# Altium PCB motor-controller.PcbDoc
Units mm, origin at the board's own origin, x right, y up, seen from the top; angles counter-clockwise.
Board outline 152.4 x 101.6 mm, 2 copper layers (Top Layer, Bottom Layer); 105 components, 70 nets, 326 pads, 119 vias.
Unrouted connection lines stored in the file: 218.
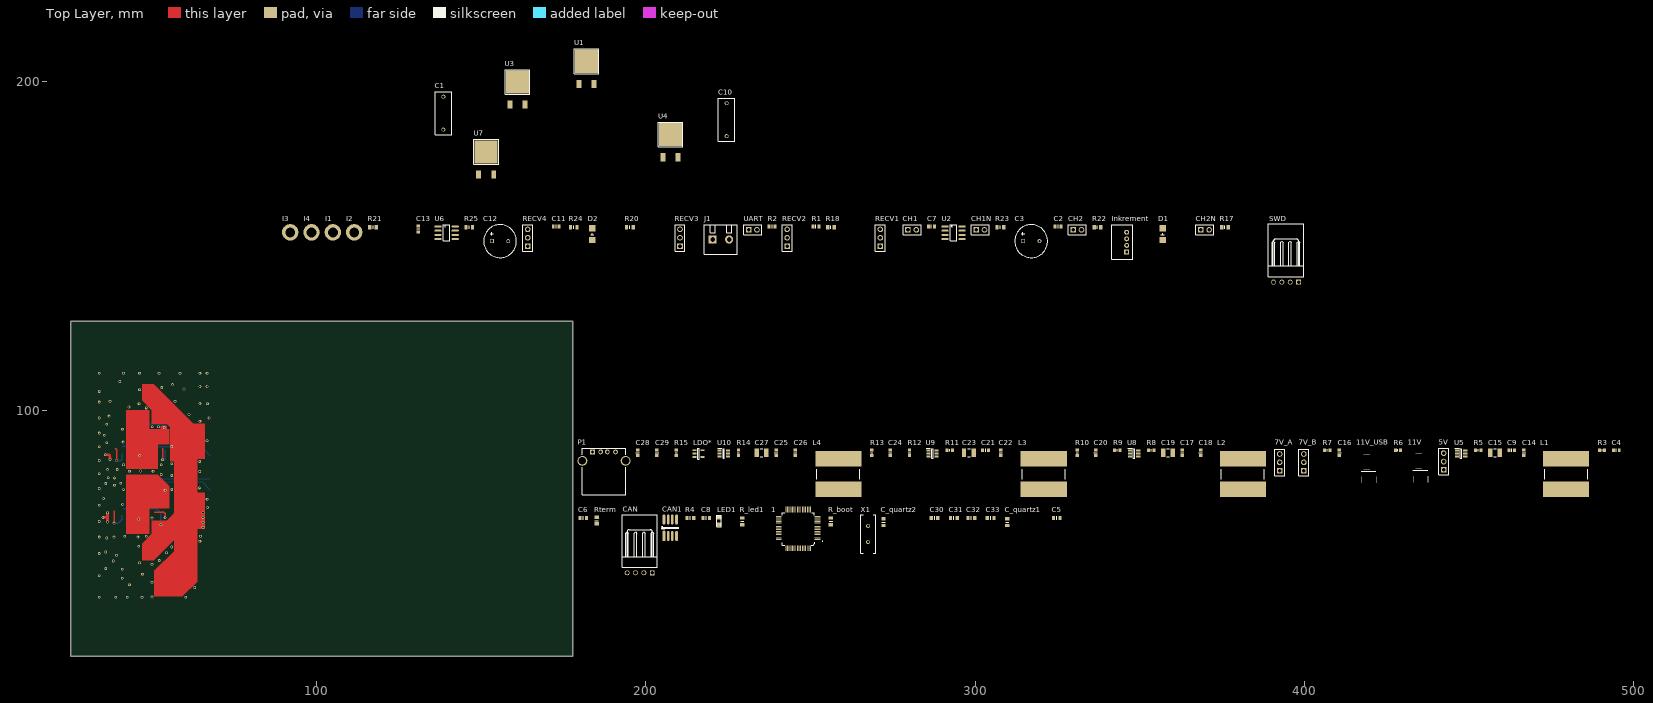
[diagram p0: Top Layer view]
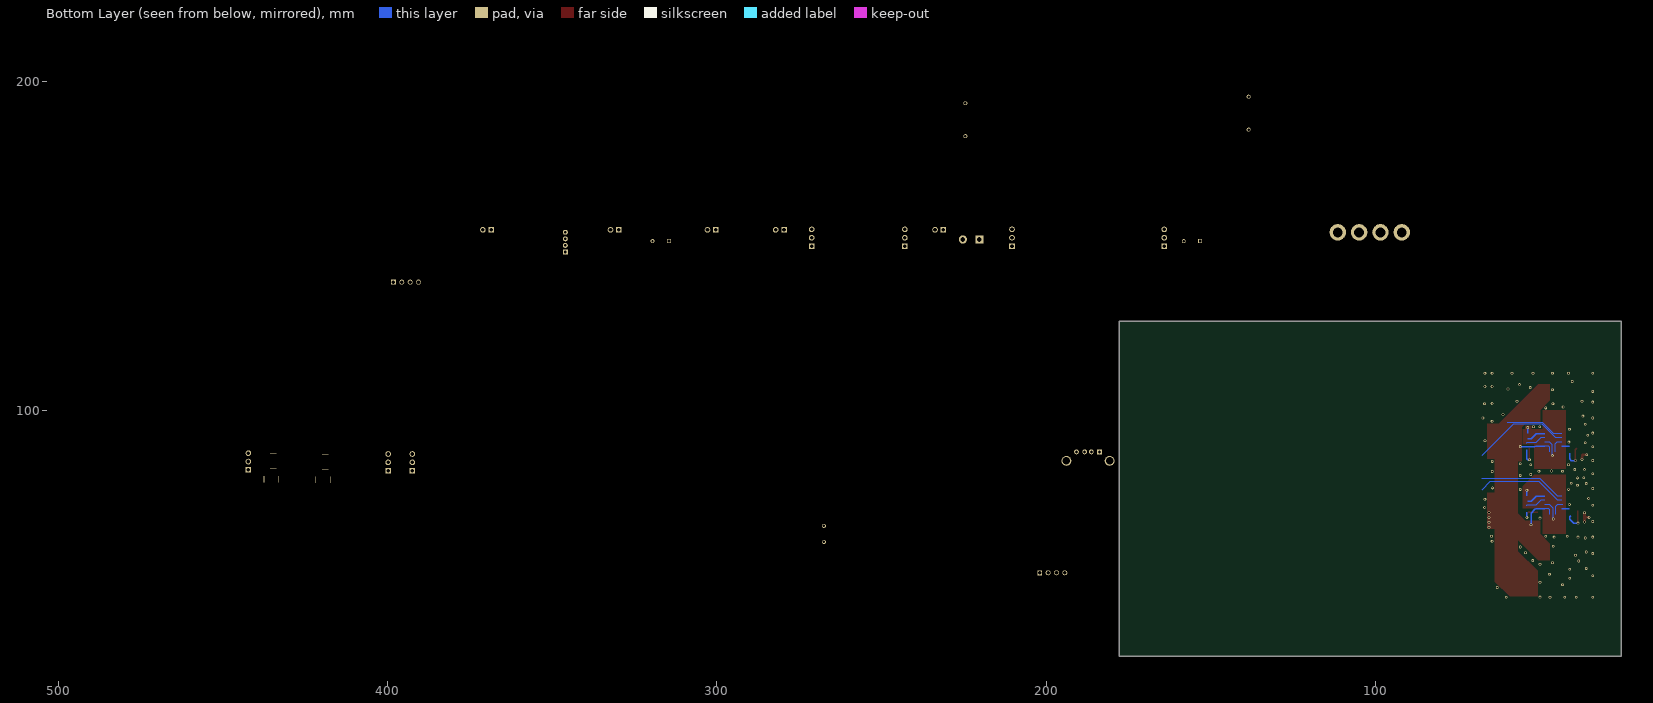
[diagram p1: Bottom Layer view, seen from below]

## Layer stack, top to bottom
Top Solder: solder mask 0.0102, Solder Resist, Dk 3.5
Top Layer: signal copper 0.0356
Dielectric 1: dielectric 0.32, FR-4, Dk 4.8
Bottom Layer: signal copper 0.0356
Bottom Solder: solder mask 0.0102, Solder Resist, Dk 3.5

## Board outline
25.4,25.4 177.8,25.4 177.8,127 25.4,127

## Design rules (kind name [scope] priority, off if disabled: settings)
BoardOutlineClearance [All] p1: gap=0.2 ignorepadtopadclearanceinfootprint=FALSE
Clearance [All] p1: gap=0.203 ignorepadtopadclearanceinfootprint=FALSE except(0.25: Arc-Hole Track-Hole SMDPad-Hole THPad-Hole Via-Hole Fill-Hole Poly-Hole Region-Hole Text-Hole)
ComponentClearance [All] p1: gap=0.127 collisioncheckmode=3 verticalgap=0.127 showdistances=TRUE
DiffPairsRouting [All] p1: maxlimit=0.381 minlimit=0.203 mostfreqgap=0.203 toplayer_minwidth=0.203 toplayer_maxwidth=25.4 toplayer_prefwidth=0.203 bottomlayer_minwidth=0.203 bottomlayer_maxwidth=25.4 bottomlayer_prefwidth=0.203 maxuncoupledlength=12.7
Height [All] p1: minheight=0 maxheight=1816.048 prefheight=12.7
HoleSize [All] p1: absolutevalues=TRUE maxlimit=6.3 minlimit=0.3 maxpercent=80.000 minpercent=20.000
HoleToHoleClearance [All] p1: gap=0.25 allowstackedmicrovias=FALSE
MinimumAnnularRing [All] p1: minimumring=0.076
MinimumSolderMaskSliver [All] p1: minsoldermaskwidth=0
PlaneClearance [All] p1: clearance=0.203
PlaneConnect PlaneConnectPowerPads [InPadClass('PowerPads')] p1: planeconnectstyle=Direct reliefexpansion=0.508 reliefentries=4 reliefconductorwidth=0.254 reliefairgap=0.254
PlaneConnect [All] p2: pad.planeconnectstyle=Relief pad.reliefexpansion=0.3 pad.reliefentries=4 pad.reliefconductorwidth=0.203 pad.reliefairgap=0.203 via.planeconnectstyle=Direct via.reliefexpansion=0.3 via.reliefentries=4 via.reliefconductorwidth=0.127 via.reliefairgap=0.127
PolygonConnect PolygonConnectPowerPads [All vs (InPadClass('PowerPads'))] p1: connectstyle=Direct reliefconductorwidth=0.254 reliefentries=4 polygonreliefangle="90 Angle" airgapwidth=0.254
PolygonConnect [All] p2: thpad.connectstyle=Relief thpad.reliefconductorwidth=0.203 thpad.reliefentries=4 thpad.polygonreliefangle="90 Angle" thpad.airgapwidth=0.203 smdpad.connectstyle=Relief smdpad.reliefconductorwidth=0.203 smdpad.reliefentries=4 smdpad.polygonreliefangle="90 Angle" smdpad.airgapwidth=0.203 via.connectstyle=Direct via.reliefconductorwidth=0.127 via.reliefentries=4 via.polygonreliefangle="90 Angle" via.airgapwidth=0.127
RoutingVias [All] p1: holewidth=0.3 width=0.6 viastyle="Through Hole" minholewidth=0.3 minwidth=0.6 maxholewidth=0.6 maxwidth=6.6
SilkToSilkClearance [All] p1: silktosilkclearance=0
SilkToSolderMaskClearance [IsPad] p1: minsilkscreentomaskgap=0.127 clearancetoexposedcopper=TRUE
SolderMaskExpansion [All] p1: expansion=0.075
Width [All] p1: maxlimit=25.4 minlimit=0.2 preferedwidth=0.2 minimp=50.000000 maximp=50.000000 favimp=50.000000
20 further rules are at their usual default settings.

## Classes and differential pairs
component class power: 5V 7V_A 7V_B 11V 11V_USB C4 C9 C14 C15 C16 C17 C18 C19 C20 C21 C22 C23 C24 C25 C26 C27 C28 C29 L1 L2 L3 L4 LDO* P1 R3 R5 R6 R7 R8 R9 R10 R11 R12 R13 R14 R15 U5 U8 U9 U10
component class microcontroller-pinout-motor-controller: 1 C5 C6 C8 C30 C31 C32 C33 C_quartz1 C_quartz2 CAN CAN1 LED1 R4 R_boot R_led1 Rterm X1
component class main: C1 C2 C3 C7 C10 C11 C12 C13 CH1 CH1N CH2 CH2N D1 D2 I1 I2 I3 I4 Inkrement J1 R1 R2 R17 R18 R20 R21 R22 R23 R24 R25 RECV1 RECV2 RECV3 RECV4 SWD U1 U2 U3 U4 U6 U7 UART
differential pair CANH: +CANH_P -CANH_N

## Components (designator, comment, footprint, x,y, rotation, side; value= is the part's Value field where it differs from the comment)
1 "64-pin STM32F4 chip with symbol for Foxcar Control Board v1." LQFP64 246.253,64.008 r90 top
5V "3-Pin HEADER" "3-Pin HEADER" 442.214,81.915 r90 top
7V_A "3-Pin HEADER" "3-Pin HEADER" 392.43,81.661 r90 top
7V_B "3-Pin HEADER" "3-Pin HEADER" 399.796,81.661 r90 top
11V "T_PLUG" T_plug 435.229,79.121 r90 top
11V_USB "T_PLUG" T_plug 419.481,78.867 r90 top
C1 "R60DF4220506AJ" "10mm lead spacing CAP" 138.5,185.25 r90 top
C2 "VJ0805Y104JXATW1BC" 0805 325.159,155.831 r0 top
C3 "EEU-FR1V471" "5mm lead spacing ELCAP" 314.491,151.386 r0 top
C4 "C0805C104M5RACTU" 0805 494.665,87.884 r0 top
C5 "100nF" FP_0805_CAP_085 324.739,67.31 r0 top
C6 "100nF" FP_0805_CAP_085 180.975,67.31 r0 top
C7 "VJ0805Y105KXQTW1BC" 0805 286.678,155.831 r0 top
C8 "100nF" FP_0805_CAP_085 218.313,67.31 r0 top
C9 "GRM21BR61E106MA73L" 0805 462.915,87.884 r0 top
C10 "R60DF4220506AJ" "10mm lead spacing CAP" 224.5,183.25 r90 top
C11 "VJ0805Y104JXATW1BC" 0805 172.759,155.831 r0 top
C12 "EEU-FR1V471" "5mm lead spacing ELCAP" 153.201,151.386 r0 top
C13 "VJ0805Y105KXQTW1BC" 0805 130.849,155.069 r90 top
C14 "C0805C104M5RACTU" 0805 466.598,87.122 r90 top
C15 "TMK325B7226KMHP" 1210 457.835,87.122 r0 top
C16 "C0805C104M5RACTU" 0805 410.591,87.122 r90 top
C17 "GRM21BR61E106MA73L" 0805 362.839,87.122 r90 top
C18 "C0805C104M5RACTU" 0805 368.427,87.122 r90 top
C19 "TMK325B7226KMHP" 1210 358.521,87.122 r0 top
C20 "C0805C104M5RACTU" 0805 336.55,87.122 r90 top
C21 "GRM21BR61E106MA73L" 0805 303.149,87.884 r0 top
C22 "C0805C104M5RACTU" 0805 307.721,87.122 r90 top
C23 "TMK325B7226KMHP" 1210 298.069,87.122 r0 top
C24 "C0805C104M5RACTU" 0805 274.193,87.122 r90 top
C25 "GRM21BR61E106MA73L" 0805 239.522,87.122 r90 top
C26 "C0805C104M5RACTU" 0805 245.364,87.122 r90 top
C27 "TMK325B7226KMHP" 1210 235.077,87.122 r0 top
C28 "VJ0805Y105KXQTW1BC" 0805 197.485,87.122 r90 top
C29 "VJ0805Y105KXQTW1BC" 0805 203.327,87.122 r90 top
C30 "100nF" FP_0805_CAP_085 287.655,67.31 r0 top
C31 "100nF" FP_0805_CAP_085 293.497,67.31 r0 top
C32 "100nF" FP_0805_CAP_085 298.831,67.31 r0 top
C33 "100nF" FP_0805_CAP_085 304.673,67.31 r0 top
C_quartz1 "22pF" FP_0805_CAP_085 309.753,66.04 r90 top
C_quartz2 "22pF" FP_0805_CAP_085 272.161,66.04 r90 top
CAN "Connector" FP_CONN4_TAP_254MM_90 201.93,50.673 r90 top
CAN1 "CAN transceiver" SOIC-8 205.486,61.849 r90 top
CH1 "2-Pin Header" "2-Pin Header" 279.566,154.815 r0 top
CH1N "2-Pin Header" "2-Pin Header" 300.267,154.815 r0 top
CH2 "2-Pin Header" "2-Pin Header" 329.731,154.815 r0 top
CH2N "2-Pin Header" "2-Pin Header" 368.466,154.815 r0 top
D1 "SS32A" DO-214AC(SMA) 356.909,153.545 r90 top
D2 "SS32A" DO-214AC(SMA) 183.681,153.545 r90 top
I1 "M3 screw drillhole" "3mm diameter drill" 104.941,154.053 r0 top
I2 "M3 screw drillhole" "3mm diameter drill" 111.418,154.053 r0 top
I3 "M3 screw drillhole" "3mm diameter drill" 91.987,154.053 r0 top
I4 "M3 screw drillhole" "3mm diameter drill" 98.464,154.053 r0 top
Inkrement "43-17-42" 43-17-42 345.987,148.084 r90 top
J1 "1935776" "PT 2,5/ 2-5,0-H" 220.257,151.894 r0 top
L1 "SDR1307-120ML" SDR1307 479.425,80.645 r0 top
L2 "SDR1307-120ML" SDR1307 381.254,80.645 r0 top
L3 "SDR1307-5R6ML" SDR1307 320.802,80.645 r0 top
L4 "SDR1307-5R6ML" SDR1307 258.445,80.645 r0 top
LDO* "RT9013 LDO Voltage Regulator" RT9013_SOT23 214.757,87.884 r0 top
LED1 "LED Red" FP_0805_LED_RED 222.25,65.405 r90 top
P1 "MC32593" MC32593 183.769,87.376 r0 top
R1 "CR0805-FX-20R0ELF" 0805 251.626,155.831 r0 top
R2 "CR0805-FX-20R0ELF" 0805 238.291,155.831 r0 top
R3 "RC0603FR-0730RL" 0603_RES 490.347,87.884 r0 top
R4 "47K" FP_0805_RES 213.487,67.31 r0 top
R5 "CRCW060380K6FKEA" 0603_RES 452.755,87.884 r0 top
R6 "CRCW060310K0FKEA" 0603_RES 428.371,87.884 r0 top
R7 "RC0603FR-0730RL" 0603_RES 406.908,87.884 r0 top
R8 "CRCW060380K6FKEA" 0603_RES 353.441,87.884 r0 top
R9 "CRCW060310K0FKEA" 0603_RES 343.154,87.884 r0 top
R10 "RC0603FR-0730RL" 0603_RES 330.962,87.122 r90 top
R11 "CRCW060352K3FKEA" 0603_RES 292.227,87.884 r0 top
R12 "CRCW060310K0FKEA" 0603_RES 280.035,87.122 r90 top
R13 "RC0603FR-0730RL" 0603_RES 268.605,87.122 r90 top
R14 "CRCW060352K3FKEA" 0603_RES 228.092,87.122 r90 top
R15 "CRCW060310K0FKEA" 0603_RES 209.169,87.122 r90 top
R17 "10K" FP_0805_RES 375.832,155.577 r0 top
R18 "10K" FP_0805_RES 256.198,155.577 r0 top
R20 "10K" FP_0805_RES 195.111,155.577 r0 top
R21 "10K" FP_0805_RES 117.133,155.577 r0 top
R22 "10K" FP_0805_RES 337.097,155.577 r0 top
R23 "10K" FP_0805_RES 307.633,155.577 r0 top
R24 "10K" FP_0805_RES 178.093,155.577 r0 top
R25 "10K" FP_0805_RES 146.343,155.577 r0 top
R_boot "10K" FP_0805_RES 256.159,66.294 r90 top
R_led1 "1K" FP_0805_RES 229.235,66.294 r90 top
RECV1 "3-Pin HEADER" "3-Pin HEADER" 271.184,149.862 r90 top
RECV2 "3-Pin HEADER" "3-Pin HEADER" 242.863,149.862 r90 top
RECV3 "3-Pin HEADER" "3-Pin HEADER" 210.351,149.862 r90 top
RECV4 "3-Pin HEADER" "3-Pin HEADER" 164.123,149.862 r90 top
Rterm "120R" FP_0805_RES 185.039,66.548 r90 top
SWD "Connector" FP_CONN4_TAP_254MM_90 398.184,138.94 r90 top
U1 "IRLR8743TRLPBF" "TO-252 (DPAK)" 182,206 r0 top
U2 "IRS2186STRPBF" "8-Pin SOIC" 293.409,153.926 r0 top
U3 "IRLR8743TRLPBF" "TO-252 (DPAK)" 161,199.75 r0 top
U4 "IRLR8743TRLPBF" "TO-252 (DPAK)" 207.5,183.75 r0 top
U5 "TPS56339" SOT-23-Thin-6 447.548,86.868 r0 top
U6 "IRS2186STRPBF" "8-Pin SOIC" 139.485,153.926 r0 top
U7 "IRLR8743TRLPBF" "TO-252 (DPAK)" 151.5,178.5 r0 top
U8 "TPS56339" SOT-23-Thin-6 348.234,86.868 r0 top
U9 "TPS56339" SOT-23-Thin-6 287.02,86.868 r0 top
U10 "TPS56339" SOT-23-Thin-6 223.647,86.868 r0 top
UART "2-Pin HEADER" "2-Pin Header" 231.179,154.815 r0 top
X1 "8MHz" FP_CRYSTAL_HC49 267.462,62.484 r90 top

## Footprints (in the part's own frame and the unit in brackets; to place one, negate y for a bottom-side part, rotate by r counter-clockwise, add the part's x,y. Pads: shape width x height; smd on the part's side, far side on the other; paste and mask are expansions set on the pad)
"2-Pin Header" [mm]
  rect 1.7x1.7 hole 1.1 mask+0.035: 1(0,0)
  round 1.7 hole 1.1 mask+0.035: 2(2.54,0)
  silkscreen extent -1.5,-1.5 4,1.5, body extent -1.27,-1.24 3.81,1.25, height 8.54
"3-Pin HEADER" [mm]
  rect 1.7x1.7 hole 1.1 mask+0.035: 1(0,0)
  round 1.7 hole 1.1 mask+0.035: 2(2.54,0) 3(5.08,0)
  silkscreen extent -1.5,-1.5 6.54,1.5, body extent -1.27,-1.24 6.35,1.25, height 8.54
"3mm diameter drill" [mm]
  round 5 hole 3: 0(0,0)
"5mm lead spacing ELCAP" [mm]
  rect 1.2x1.2 hole 0.7 square: 1(0,0)
  round 1.2 hole 0.7: 2(5,0)
  silkscreen extent -2.5,-5 7.5,5, body extent -2.53,-5.03 7.53,5.03, height 16.53
"8-Pin SOIC" [mm] "Narrow body"
  oval 2.2x0.6 smd mask+0.035: 1(-2.6,1.905) 2(-2.6,0.635) 3(-2.6,-0.635) 4(-2.6,-1.905) 5(2.6,-1.905) 6(2.6,-0.635) 7(2.6,0.635) 8(2.6,1.905)
  silkscreen extent -1,-2.5 1,2.5, body extent -3,-2.45 3,2.45, height 1.7
"10mm lead spacing CAP" [mm]
  round 1.2 hole 0.7: 1(0,0) 2(10,0)
  silkscreen extent -1.5,-2.5 11.5,2.5, body extent -1.6,-2.63 11.6,2.58, height 12.05
43-17-42 [mm]
  rect 1.5x1.5 hole 0.8 mask+0.035: 1(0,0)
  round 1.5 hole 0.8 mask+0.035: 2(2,0) 3(4,0) 4(6,0)
  silkscreen extent -2.2,-1.8 8.2,4.5
0603_RES [mm]
  rect 0.9x1 smd: 1(-0.8,0) 2(0.8,0)
  silkscreen extent 0,-0.33 0,0.33, body extent -0.8,-0.43 0.8,0.43, height 0.55
0805 [mm]
  rect 0.9x1.1 smd mask+0.035: 1(-0.9,0) 2(0.9,0)
  silkscreen extent 0,-0.5 0,0.5, body extent -1,-0.6 1,0.6, height 1.2
1210 [mm]
  rect 1.3x2.7 smd mask+0.035: 1(-1.45,0) 2(1.45,0)
  silkscreen extent -0.4,-1.25 0.4,1.25, body extent -1.6,-1.25 1.6,1.25, height 2.5
DO-214AC(SMA) [mm]
  rect 1.96x2.04 smd mask+0.035: A(1.81,0) K(-1.81,0)
  silkscreen extent -0.25,-0.5 0.25,0.5, body extent -2.6,-1.3 2.6,1.3, height 2.35
FP_0805_CAP_085 [mm] "0805 kapacitás YAGEO 0.85mm magas"
  rect 1x1.3 smd: 1(-1,0) 2(1,0)
  silkscreen extent 0,-0.5 0,0.5, body extent -1,-0.64 1.03,0.64, height 0.85
FP_0805_LED_RED [mm] "0805 méretû piros LED"
  rect 1.2x1.3 smd: A(-0.1,0) K(2.1,0)
  silkscreen extent -0.8,-0.7 2.8,0.7, body extent 0.01,-0.63 2.03,0.62, height 1.1
FP_0805_RES [mm] "0805 ellenállás"
  rect 1x1.3 smd: 1(-1,0) 2(1,0)
  silkscreen extent 0,-0.5 0,0.5, body extent -1,-0.62 1,0.63, height 0.62
FP_CONN4_TAP_254MM_90 [mm] "fekvõ két pólusú tápcsatlakozó 2.54mm"
  rect 1.5x1.5 hole 1.1: 1(0,0)
  round 1.5 hole 1.1: 2(0,2.54) 3(0,5.08) 4(0,7.62)
  silkscreen extent 1.7,-1.53 17.7,9.15, body extent -0.34,-1.3 13.48,8.86, height 5.8
FP_CRYSTAL_HC49 [mm] "HC49"
  round 1.2 hole 0.762: 1(-2.44,0) 2(2.44,0)
  silkscreen extent -5.82,-2.29 5.74,2.29, body extent -5.68,-2.35 5.68,2.3, height 3.5
LQFP64 [mil]
  rect 10x70 smd: 1(-147.5,-232.34) 2(-127.82,-232.34) 3(-108.13,-232.34) 4(-88.45,-232.34) 5(-68.76,-232.34) 6(-49.08,-232.34) 7(-29.39,-232.34) 8(-9.71,-232.34) 9(9.98,-232.34) 10(29.66,-232.34) 11(49.35,-232.34) 12(69.03,-232.34) 13(88.72,-232.34) 14(108.4,-232.34) 15(128.09,-232.34) 16(147.77,-232.34) 33(147.77,232.34) 34(128.09,232.34) 35(108.4,232.34) 36(88.72,232.34) 37(69.03,232.34) 38(49.35,232.34) 39(29.66,232.34) 40(9.98,232.34) 41(-9.71,232.34) 42(-29.39,232.34) 43(-49.08,232.34) 44(-68.76,232.34) 45(-88.45,232.34) 46(-108.13,232.34) 47(-127.82,232.34) 48(-147.5,232.34)
  rect 70x10 smd: 17(232.34,-147.77) 18(232.34,-128.09) 19(232.34,-108.4) 20(232.34,-88.72) 21(232.34,-69.03) 22(232.34,-49.35) 23(232.34,-29.66) 24(232.34,-9.98) 25(232.34,9.71) 26(232.34,29.39) 27(232.34,49.08) 28(232.34,68.76) 29(232.34,88.45) 30(232.34,108.13) 31(232.34,127.82) 32(232.34,147.5) 49(-232.34,147.78) 50(-232.34,128.09) 51(-232.34,108.41) 52(-232.34,88.72) 53(-232.34,69.04) 54(-232.34,49.35) 55(-232.34,29.67) 56(-232.34,9.98) 57(-232.34,-9.7) 58(-232.34,-29.39) 59(-232.34,-49.07) 60(-232.34,-68.76) 61(-232.34,-88.44) 62(-232.34,-108.13) 63(-232.34,-127.81) 64(-232.34,-147.5)
  silkscreen extent -194,-292 191,193
MC32593 [mm]
  round 3 hole 2.3: 0(-3.07,-2.71) 0(10.07,-2.71)
  rect 1.428x1.428 hole 0.92: 1(0,0)
  round 1.428 hole 0.92: 2(2.5,0) 3(4.5,0) 4(7,0)
  silkscreen extent -3.05,-13.01 10.09,1.09
"PT 2,5/ 2-5,0-H" [mm]
  rect 2.5x2.5 hole 1.4: 1(0,0)
  round 2.5 hole 1.4: 2(5,0)
  silkscreen extent -2.5,-4.5 7.5,4.5, body extent -2.5,-4.5 7.5,4.5, height 13.55
RT9013_SOT23 [mm] "RT9013 LDO Voltage Regulator"
  rect 1.2x0.6 smd: EN(0,-2.08) GND(0,-1.04) NC(2.4,-2.08) Vin(0,0) Vout(2.4,0)
  silkscreen extent 1.02,-2.67 1.4,0.64
SDR1307 [mm]
  rect 14x4.75 smd: 1(0,4.625) 2(0,-4.625)
  silkscreen extent -6.5,-1.5 6.5,1.5
SOIC-8 [mm]
  rect 3x0.8 smd: 1(0,0)
  oval 3x0.8 smd: 2(0,-1.27) 3(0,-2.54) 4(0,-3.81) 5(5,-3.81) 6(5,-2.54) 7(5,-1.27) 8(5,0)
  silkscreen extent 1.83,-4.44 2.82,0.64
SOT-23-Thin-6 [mm]
  rect 1.25x0.6 smd: 1(-1.25,0.95) 2(-1.25,0) 3(-1.25,-0.95) 4(1.25,-0.95) 5(1.25,0) 6(1.25,0.95)
  silkscreen extent -1.88,-1.45 0.2,1.6, body extent -1.4,-1.45 1.4,1.45, height 1.1
T_plug [mm]
  rect 2x4.7 hole 4.2 square: 1(0,0)
  rect 4.7x2 hole 4.2 square: 2(5.5,0.6)
  silkscreen extent 2.7,-2.2 2.7,2.3
"TO-252 (DPAK)" [mm]
  rect 7x7 smd mask+0.035: D(0,0)
  rect 1.5x2.5 smd mask+0.035: G(-2.3,-6.9) S(2.3,-6.9)
  silkscreen extent -3.75,-3.75 3.75,3.75, body extent -3.37,-6.78 3.37,3.32, height 2.37

## Part data
1: library part STM32F4R_64PIN_FOXCAR, Package=LQFP64, DeviceSetName=STM32F4R_64PIN_FOXCAR, GateName_1=G$1, LibraryName=stm32f4, SymbolName_1=STM32F4_64PINS_FOXCARV1
11V 11V_USB: "LiPo battery T plug connector"
C1 C10: "General Purpose Metallized Polyester Film Capacitor, 2.2 uF, 40 VAC, 63 VDC , 5 %", Capacitance=2.2uF
C2 C11: "SMD Multilayer Ceramic Capacitor, 0805 [2012 Metric], 0.1 µF, 50 V, ± 5%, X7R, VJ Series", Capacitance=0.1uF
C3 C12: "Aluminum Electrolytic Capacitors, 470uF, Low ESR", Capacitance=470uF
C4 C14 C16 C18 C20 C22 C24 C26: "Multilayer Ceramic Capacitors MLCC - SMD/SMT 50V 0.1uF X7R 0805 20%", Capacitance=0.1uF
C5 C6 C8 C30 C31 C32 C33: library part "CAP 100nF", "Capacitor", Tolerance=+80%/-20%, Voltage=25V, Name="SMD Multilayer Ceramic Capacitor, 0805", Reference=1759167, Supplier=Farnell
C7 C13 C28 C29: "SMD Multilayer Ceramic Capacitor, 0805 [2012 Metric], 1 µF, 10 V, ± 10%, X7R, VJ Series", Capacitance=1uF
C9 C17 C21 C25: "Multilayer Ceramic Capacitors MLCC - SMD/SMT 0805 10uF 25volts X5R 20%", Capacitance=10uF
C15 C19 C23 C27: "Multilayer Ceramic Capacitors MLCC - SMD/SMT 1210 25V 22uF 10% X7R AEC-Q200", Capacitance=22uF
C_quartz1 C_quartz2: library part "CAP 22pF", "Capacitor", Tolerance=5%, Voltage=50V, Name="SMD Multilayer Ceramic Capacitor, 0805", Reference=1759195, Supplier=Farnell
CAN SWD: library part Connector_4pin, "4pin Connector"
CAN1: library part SN65HVD230
CH1 CH1N CH2 CH2N: "TÜSKESOR 2 P SMD SPHSS220-B02-4/3 (T-T) 2mm PIN 0.5x0.5 TÖRDELHETÖ [ 43-10-37 ]"
D1 D2: "3A 40V DO-214AC SCH.RECT. SS34A (YET) SMA (SK34A;SX34) [ 83-02-56 ]"
I1 I2 I3 I4: "5mm diameter via with 3mm hole"
Inkrement: "TÁPCSATL. 2.00mm 4P APA 90° NCW200S-04R (G-S) FORR. [ 43-17-42 ]"
J1: "PCB terminal block, nominal current: 32 A, nom. voltage: 400 V, pitch: 5 mm, number of positions: 2"
L1 L2: "Fixed Inductors 12uH 20% SMD 1307", Inductance=12uH
L3 L4: "Fixed Inductors 5.6uH 20% SMD 1307", Inductance=5.6uF
LDO*: library part RT9013, "LDO Voltage Regulator"
LED1: "Red LED", I_max=20mA, Name="MULTICOMP  MCL-S270SRC  LED, Red, SMD, 1.25mm x 1.4mm, 20 mA, 1.85 V, 643 nm", Reference=1581239, Supplier=Farnell, U_fw=1.85V, Wavelength=643nm
P1: "USB Connector, USB Type A, USB 2.0, Receptacle, 4 Ways, Through Hole Mount, Right Angle"
R1 R2: "Thick Film Resistors - SMD 20ohm 1%", Resistance=20
R3 R7 R10 R13: "Thick Film Resistors - SMD 30 OHM 1%", Resistance=30
R4: library part "RES 47K", "Resistor", Power=125mW, Tolerance=5%, Name="YAGEO (PHYCOMP)  RC0805JR-0747KL  SMD Chip Resistor, Thick Film, 47 kohm", Reference=9234217, Supplier=Farnell
R5 R8: "Thick Film Resistors - SMD 1/10watt 80.6Kohms 1%", Resistance=80K6
R6 R9 R12 R15: "Thick Film Resistors - SMD 1/10watt 10Kohms 1%", Resistance=10K
R11 R14: "Thick Film Resistors - SMD 1/10watt 52.3Kohms 1%", Resistance=52.3K
R17 R18 R20 R21 R22 R23 R24 R25 R_boot: library part "RES 10K", "Resistor", Power=125mW, Tolerance=5%, Name="YAGEO (PHYCOMP)  RC0805JR-0710KL  SMD Chip Resistor, Thick Film, 10 kohm", Reference=9234136, Supplier=Farnell
R_led1: library part "RES 1K", "Resistor", Power=125mW, Tolerance=5%, Name="YAGEO (PHYCOMP)  RC0805JR-071KL  SMD Chip Resistor, Thick Film, 1 kohm", Reference=9234004, Supplier=Farnell
Rterm: library part "RES 120R", "Resistor", Power=125mW, Tolerance=5%, Name="YAGEO (PHYCOMP)  RC0805JR-07120RL  SMD Chip Resistor, Thick Film, 120 ohm", Reference=9233890, Supplier=Farnell
U1 U3 U4 U7: "HEXFET2Power MOSFET, Vdss=30V, Rdson=3.1mOhm, Qg=39nC, Id=160A"
U2 U6: "High and Low Side Driver"
U5 U8 U9 U10: "4.5-V to 24-V Input, 3-A Output Synchronous Buck Converter"
X1: library part Crystal, "Quarz Crystal"

## Via types
v1: diameter 0.85, hole 0.5, Top Layer to Bottom Layer, tented both sides, 119 vias

## Nets (pads, with @x,y where several pads share a name; then routed paths per layer and width w, separated by ;. In a path a pad name is that pad's centre, name@x,y a point inside that pad or via, vN(x,y) a via of type N, cw(c..) or ccw(c..) an arc to the next point about the centre after c; other vN are vias at no path point)
3V3: 1.13 1.19 1.32 1.34 1.48 1.64 C5.2 C6.1 C29.2 C30.2 C31.2 C32.2 C33.2 CAN1.3 LDO*.Vout
5V: 5V.2 C23.2 C28.2 CAN.1 Inkrement.1 L3.2 LDO*.EN LDO*.Vin R11.2 RECV1.2 RECV2.2 RECV3.2 RECV4.2 SWD.1
5V_USB: C27.2 L4.2 P1.1 R14.2
7V2_A: 7V_A.2 C15.2 L1.2 R5.2
7V2_B: 7V_B.2 C19.2 L2.2 R8.2
11V1: 11V.1 C1.2 C3.1 C7.2 C9.2 C10.2 C12.1 C13.2 C14.2 C17.2 C18.2 C21.2 C22.2 D1.A D2.A U1.D U2.5 U4.D U5.3 U6.5 U8.3 U9.3
11V1_USB: 11V_USB.1 C25.2 C26.2 U10.3
CAN_RX: 1.44 CAN1.4
CAN_TX: 1.45 CAN1.1
CANH_N: CAN1.6 CAN.3 Rterm.2
CANH_P: CAN1.7 CAN.2 Rterm.1
ENCODER_A: 1.37 Inkrement.2
ENCODER_B: 1.38 Inkrement.3
EXTRA_SERVO: 1.58 5V.1
FRONT_SERVO: 1.14 7V_B.1
GND: 1.12 1.18 1.31 1.33 1.35 1.36 1.47 1.63 5V.3 7V_A.3 7V_B.3 11V.2 11V_USB.2 C1.1 C3.2 C5.1 C6.2 C7.1 C8.1 C9.1 C10.1 C12.2 C13.1 C14.1 C15.1 C17.1 C18.1 C19.1 C21.1 C22.1 C23.1 C25.1 C26.1 C27.1 C28.1 C29.1 C30.1 C31.1 C32.1 C33.1 C_quartz1.1 C_quartz2.1 CAN1.2 CAN.4 Inkrement.4 LDO*.GND LED1.K P1.0 P1.4 R4.2 R6.1 R9.1 R12.1 R15.1 R18.2 R21.2 R_boot.1 RECV1.3 RECV2.3 RECV3.3 RECV4.3 SWD.4 U2.3 U3.S U5.1 U6.3 U7.S U8.1 U9.1 U10.1
MOT+: C2.1 J1.1 R17.2 U1.S U2.6 U3.D
MOT-: C11.1 J1.2 R20.2 U4.S U6.6 U7.D
MOT_CH1: 1.41 CH1.1
MOT_CH1_X: CH1.2 U2.1
MOT_CH1N: 1.23 CH1N.1
MOT_CH1N_X: CH1N.2 U2.2
MOT_CH2: 1.42 CH2.1
MOT_CH2_X: CH2.2 U6.1
MOT_CH2N: 1.26 CH2N.1
MOT_CH2N_X: CH2N.2 U6.2
Net1_5: 1.5 C_quartz1.2 X1.1
Net1_6: 1.6 C_quartz2.2 X1.2
Net1_21: 1.21 R_led1.1
Net1_30: 1.30 C8.2
Net1_60: 1.60 R_boot.2
NetC2_2: C2.2 D1.K U2.8
NetC4_1: C4.1 R3.2
NetC4_2: C4.2 L1.1 U5.2
NetC11_2: C11.2 D2.K U6.8
NetC16_1: C16.1 R7.2
NetC16_2: C16.2 L2.1 U8.2
NetC20_1: C20.1 R10.2
NetC20_2: C20.2 L3.1 U9.2
NetC24_1: C24.1 R13.2
NetC24_2: C24.2 L4.1 U10.2
NetCAN1_8: CAN1.8 R4.1
NetLED1_1: LED1.A R_led1.2
NetR1_2: R1.2 UART.1
NetR2_2: R2.2 UART.2
NetR3_1: R3.1 U5.6
NetR5_1: R5.1 R6.2 U5.4
NetR7_1: R7.1 U8.6
NetR8_1: R8.1 R9.2 U8.4
NetR10_1: R10.1 U9.6
NetR11_1: R11.1 R12.2 U9.4
NetR13_1: R13.1 U10.6
NetR14_1: R14.1 R15.2 U10.4
NetR17_1: R17.1 R22.2 U1.G
NetR18_1: R18.1 R23.1 U3.G
NetR20_1: R20.1 R24.2 U4.G
NetR21_1: R21.1 R25.1 U7.G
NetR22_1: R22.1 U2.7
NetR23_2: R23.2 U2.4
NetR24_1: R24.1 U6.7
NetR25_2: R25.2 U6.4
RC_RECV1: 1.22 RECV1.1
RC_RECV2: 1.57 RECV2.1
RC_RECV3: 1.39 RECV3.1
RC_RECV4: 1.27 RECV4.1
REAR_SERVO: 1.15 7V_A.1
SYS_SWCLK: 1.49 SWD.2
SYS_SWDIO: 1.46 SWD.3
UART_RX: 1.17 R2.1
UART_TX: 1.16 R1.1
pads on no net: 1.1 1.2 1.3 1.4 1.7 1.8 1.9 1.10 1.11 1.20 1.24 1.25 1.28 1.29 1.40 1.43 1.50 1.51 1.52 1.53 1.54 1.55 1.56 1.59 1.61 1.62 CAN1.5 I1.0 I2.0 I3.0 I4.0 LDO*.NC P1.2 P1.3 U5.5 U8.5 U9.5 U10.5
copper on no net: | length 211.1
  Top Layer w0.4: v1(38.5,65.75) 38.5,69.14 38.6,69.45 ; 38.85,88.45 39.25,88.05 39.25,86.5 v1(39.25,84.75) ; 50.75,69 53.15,69 53.35,69.2 54,68.55 v1(54,67.5) ; v1(53.25,85) 53.25,86.5 53.35,86.6 53.35,88.45
  Top Layer w0.8: v1@35.3,67.5 36.3,67.511 ; v1@36.05,86.5 37.05,86.511 ; 36.489,67.3 v1@36.5,66.3 ; v1@36.5,68.7 36.511,67.7 ; 37.239,86.3 v1@37.25,85.3
  Bottom Layer w0.2: 41,89 41.095,89.095 ; 43.15,71.365 43.4,71.365 44.75,71.365 45.2,70.915 45.2,68.5 ; 43.4,72.635 44.635,72.635 50.25,78.25 65.21,78.25 67.71,75.75 ; 43.4,73.905 44.655,73.905 50,79.25 67.71,79.25 ; 43.4,90.365 45,90.365 45.45,89.915 45.45,87.5 ; 43.4,91.635 45.185,91.635 49.3,95.75 58.21,95.75 67.71,86.25 ; 43.4,92.905 45.77,92.905 49.115,96.25 60,96.25 ; v1(46,67) 46,70.25 47.115,71.365 48.6,71.365 ; v1(46.25,86.25) 46.25,89.5 47.115,90.365 48.6,90.365 ; 47.05,68.5 47.05,69.8 47.345,70.095 48.6,70.095 ; 47.05,87.5 47.05,88.8 47.345,89.095 48.6,89.095 ; 48.6,72.635 49.865,72.635 51.33,71.17 54,71.17 54,71 ; 48.6,91.635 49.865,91.635 51.33,90.17 54,90.17 54,90 ; 51.345,70.095 51.5,69.94 51.56,70 ; 51.345,89.095 51.5,88.94 51.56,89
  Bottom Layer w0.4: v1(38.5,65.75) 39.75,65.75 41,67 41,67.75 40.75,68 ; v1(39.25,84.75) 40.5,84.75 41,85.25 41,87 ; 41.095,70.095 43.4,70.095 ; 41.095,89.095 43.4,89.095 ; 48.6,70.095 51.345,70.095 ; 48.6,73.905 51.155,73.905 51.5,73.56 52.61,72.45 53.75,72.45 ; 48.6,89.095 51.345,89.095 ; 48.6,92.905 51.155,92.905 51.5,92.56 52.61,91.45 53.75,91.45 ; 51.56,70 52.75,68.81 v1(52.75,65.25) ; 51.56,89 v1(56,89) ; v1(53.25,85) 53.75,85 54,85.25 54,88 ; 53.75,93.05 v1(53.75,94.75) ; v1(54,67.5) 54,69 ; 54,74.05 v1(54,75.75)
  other v1: 34,43.25 39,43.25 42.5,43.25 47,43.25 60.25,43.25 50,43.286 63,46.213 43.15,47.04 50,47.779 41,49 34,49.75 47.165,50.25 41,51.75 36,52 50,53.25 46.224,53.75 38.276,54.25 52.25,54.371 39.25,56 34,56.5 54.415,56.75 36,57 56,58.5 46,58.75 64.562,60.25 36.25,61.25 34,61.5 38.5,61.5 45.745,61.5 41.75,61.75 48.25,61.75 64.75,61.75 65.5,64.5 65.5,66 36.5,66.1 34,66.25 50,67.276 35.1,67.5 65.5,67.5 36.5,68.9 65.5,69 66.837,70.5 34,71.17 41.095,71.425 66.75,73 35.25,73.25 41.357,76 56,76.011 34,76.25 64.474,76.463 38.664,77.25 36,77.75 40.5,77.85 36.75,79.505 38.664,79.5 56,80.259 52.835,80.511 34,80.75 64.497,81.415 43.15,81.5 50.356,81.5 46.542,81.586 36.5,82 39.474,82 52.835,83.463 41.357,83.5 56,83.759 64.497,84.5 34,84.75 37.25,85.1 35.85,86.5 34,88.94 36.25,90.187 41.25,90.365 66.736,90.75 35.5,92.446 34,93.081 41.095,94.25 50.07,95 52,95 36.25,95.75 64.562,96.7 34,97.675 67.35,97.675 37,98.25 61.25,98.75 48.25,100.75 43,101.021 46.115,102 66.837,102 64.562,102.039 34,102.5 37.25,102.75 57,102.75 34,105.75 46.25,106.25 59.75,106.5 53,106.9 64.562,107.25 66.75,107.25 56.25,107.824 40.2,108.75 34,111.261 41.357,111.261 46.25,111.261 52.125,111.25 58.5,111.25 64.562,111.261 66.75,111.261

## Other copper
Top Layer:
  region: 42.25,100 42.25,82.25 49.25,82.25 49.25,100
  region: 42.25,62.5 42.25,80.5 49.25,80.5 49.25,62.5
  region: 56.75,94.25 56.75,57.25 50.75,51.25 50.75,43.5 59.25,43.5 63.75,48 63.75,94.25
  pour cut-out: 40,88.75 40,84.15 38.5,84.15 38.5,88.75
  pour cut-out: 39.5,69.94 39.5,65.125 37.75,65.125 37.75,69.94
  pour cut-out: 54.75,70.25 54.75,66.875 53,66.875 53,70.25
  pour cut-out: 54.5,89.5 54.5,84.5 52.5,84.5 52.5,89.5
  region: 42.25,94.25
  region: 49,70.25 55.25,70.25 55.25,77 51.75,80.5 49,80.5
  region: 49,82.25 51.75,82.25 51.75,89.75 55.25,89.75 55.25,94.25 49,94.25
  region: 56.75,93.75 54.5,96 50,96 50,100 47,103 47,108 50.5,108 63.75,94.75 63.75,93.75
  region: 56.75,68.75 54.5,66.5 50,66.5 50,62.5 47,59.5 47,54.5 50.5,54.5 63.75,67.75 63.75,68.75
  region: 66,64 62.414,64 62.414,75 66,75
  region: 66,85.25 62.414,85.25 62.414,96 66,96
  region: 55.5,84.5 57.125,84.5 57.5,84.875 57.5,95 55.5,95
  region: 52.75,95.25 54.5,95.25 54.5,93.85 52.75,93.85
  pour cut-out: 66.25,111.75 66.25,62.75 65.25,62.75 65.25,111.75
  pour cut-out: 50.75,52 63.038,52 63.038,52.5 50.75,52.5
  pour cut-out: 63.25,52.021 63.25,63.202 62.75,63.202 62.75,52.021
  pour cut-out: 62.75,62.214 65.702,62.214 65.702,63.25 62.75,63.25
Bottom Layer:
  pour cut-out: 66.25,111.75 66.25,62.75 65.25,62.75 65.25,111.75
  pour cut-out: 62.75,62.214 65.702,62.214 65.702,63.25 62.75,63.25
  pour cut-out: 63.25,52.021 63.25,63.202 62.75,63.202 62.75,52.021
  pour cut-out: 50.75,52 63.038,52 63.038,52.5 50.75,52.5